# Altium PCB TIDA-010954-RevB.PcbDoc (part 3 of 8)
Units mm, origin at the board's own origin, x right, y up, seen from the top; angles counter-clockwise.
Board outline 290 x 100 mm, 6 copper layers (Top Layer, Mid1, Mid2, Mid3, Mid4, Bottom Layer), stack 1.59 mm thick; 394 components, 204 nets, 1137 pads, 2188 vias.
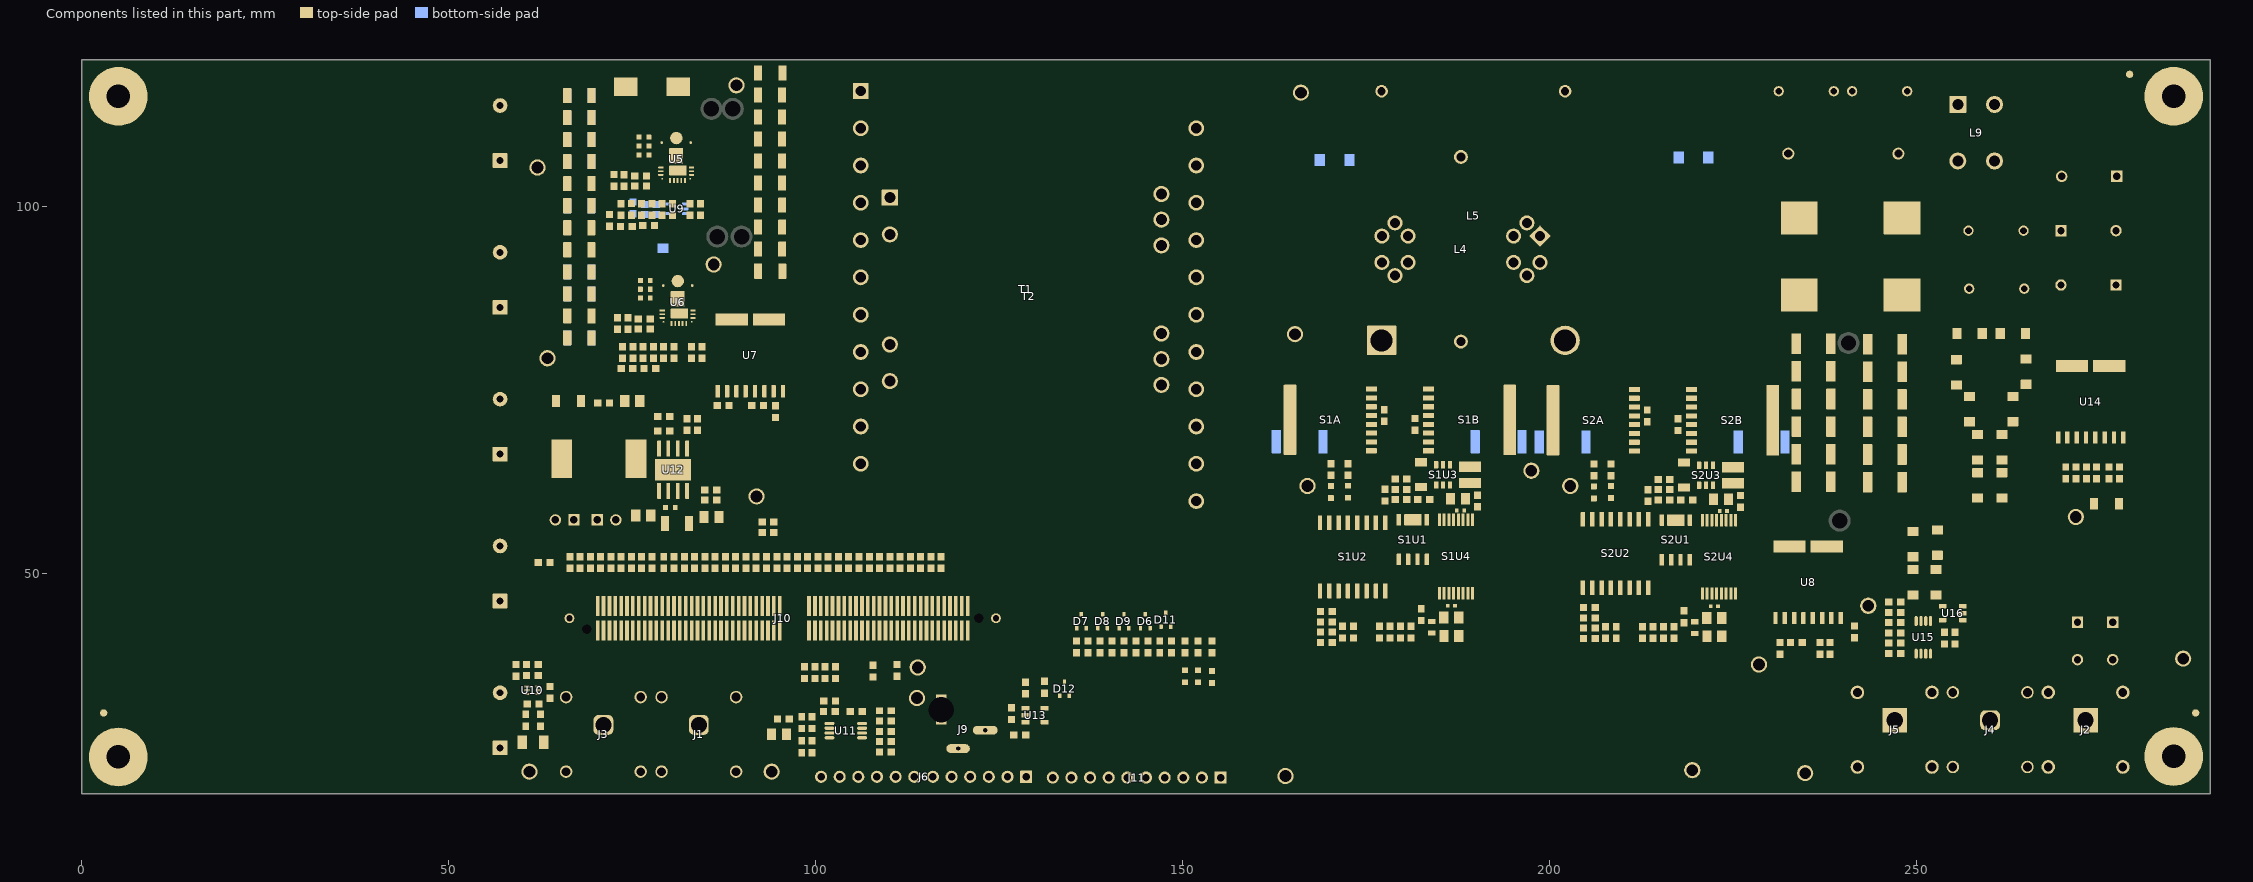
[diagram p6: the components of this part, seen from the top]

## Part data (continued)
J5: library part CMP-0098294-2, "Banana Test Connector, Socket, PCB Mount, 24 A, 1 kV, Gold Plated Contacts, Green", Current_A=24A, Digikey Part Number=4654-FCR7350G-ND, Manufacturer="CLIFF Electronic Components", Operating Temperature Range="-40°C to +80°C", Voltage_V=1kV, AEC Qualified=No, ComponentLink1Description=Datasheet, ComponentLink1URL=https://www.cliffuk.co.uk/products/testleads/sockets/fcr7350.pdf, Conn Orientation="Right Angle", ContactFinish=Gold, datasheet=https://www.cliffuk.co.uk/products/testleads/sockets/fcr7350.pdf, Datasheet Path=datasheets/Conn-FCR7350G.pdf, Digikey Description="4MM PANEL SKT S16N-PC GREEN", helpURL=https://upverter.com/upn/revision/a67ebcb8ee144784/, Lead Free=Yes, PackageReference=CONN_BANANA_JACK, Part Number=FCR7350G, PartNumber=FCR7350G, PinCount=1, RoHS=TRUE, SizeZ_mm=11.6mm, Standoff Height=0.7mm, Supplier 1=Digikey, Supplier Part Number 1=4654-FCR7350G-ND
J6: library part CMP-0075424-1, "Header, 100mil, 12x1, Gold, TH", Color=Black, Current_A=6.3A, Manufacturer=Samtec, Supplier Part Number 1=SAM1029-12-ND, Voltage_V=550V, Cert_CSA=Y, Cert_CULUS=N, Cert_UL=Y, Cert_VDE=N, ClassName=Header, CNHeader=True, ComponentLink1Description="Datasheet URL", ComponentLink1URL=http://samtec.com/ftppub/pdf/TSW_TH.PDF, CompType=Header, ContactFinish=Gold, CT=False, Gender=Male, LatestRevisionDate=2017-07-12, MountType=TH, Orientation=Vertical, PackageReference="12x1 Header", PartNumber=TSW-112-07-G-S, PinCount=12, Pitch_mm=2.54, Publisher="Texas Instruments", RoHS=Y, Row_Count=1, Shrouded=N, Supplier 1=Digi-Key
J7 J8: library part CMP-0055333-1, "Header, 2.54mm, 2x1, Tin, TH", Color=Black, Current_A=4A, Manufacturer=Molex, Supplier Part Number 1=WM50016-02-ND, Voltage_V=250V, Cert_UL=Y, ClassName=Header, CNHeader=TRUE, ComponentLink1Description="Datasheet URL", ComponentLink1URL=http://www.molex.com/pdm_docs/sd/022284023_sd.pdf, CompType=Header, ContactFinish=Tin, CT=FALSE, Gender=Male, LatestRevisionDate=26/05/2017, MountType=TH, Orientation=Vertical, PackageReference="Header, 2.54mm, 2x1, TH", PartNumber=22284023, PinCount=2, Pitch_mm=2.54, Publisher="Texas Instruments", RoHS=Y, Row_Count=1, Shrouded=N, Supplier 1=Digi-Key
J9: library part CMP-0040211-1, "Power Barrel Connector Jack 2.10mm ID (0.083\"), 5.50mm OD (0.217\") Through Hole", Current_A=3A, Digikey Part Number=732-5931-ND, Manufacturer="Wurth Electronics", Mouser Part Number=710-694106402002, Operating Temperature Range="-40°C to +85°C", Voltage_V=30V, AEC Qualified=No, ComponentLink1Description=Datasheet, ComponentLink1URL=https://www.we-online.com/components/products/datasheet/694106402002.pdf, Conn Gender=Female, Conn Orientation=Vertical, ContactFinish=Gold, datasheet=https://www.we-online.com/components/products/datasheet/694106402002.pdf, Datasheet Path=datasheets/Conn-694106402002.pdf, Digikey Description="CONN PWR JACK 2.1X5.5MM SOLDER", helpURL=https://upverter.com/upn/revision/1809d497b2602ff5/, Lead Free=Yes, Mouser Description="DC Power Jack Connector WR-DC, Male, Vertical, THT, 3 A, 20 V", PackageReference=CONN_PWR_10MM7_9MM0, Part Number=694106402002, PartNumber=694106402002, PinCount=1, RoHS=TRUE, SizeZ_mm=14.3mm, Supplier 1=Digikey, Supplier 2=Mouser, Supplier Part Number 1=732-5931-ND, Supplier Part Number 2=710-694106402002
J10: library part CMP-0003814-2, "C2000 controlCARD-120HSEC connector, SMT", Manufacturer=Samtec, ComponentLink1Description="Datasheet Link", ComponentLink1URL=http://www.samtec.com/ftppub/pdf/hsec8_dv.pdf, CompType=Connector, MountType=SMT, Note="The pin numbering does not match Samtec datasheet", PackageReference="C2000 pin numbering", PartNumber=HSEC8-160-01-L-DV-A-BL, RoHS=Y
J11: library part CMP-0075422-1, "Header, 100mil, 10x1, Gold, TH", Color=Black, Current_A=6.3A, Manufacturer=Samtec, Supplier Part Number 1=SAM1029-10-ND, Voltage_V=550V, Cert_CSA=Y, Cert_CULUS=N, Cert_UL=Y, Cert_VDE=N, ClassName=Header, CNHeader=True, ComponentLink1Description="Datasheet URL", ComponentLink1URL=http://samtec.com/ftppub/pdf/TSW_TH.PDF, CompType=Header, ContactFinish=Gold, CT=False, Gender=Male, Green_EU RoHS=Passed, Green_EU RoHS-2=Passed, Green_Lifecycle=Active, Green_REACh=Passed, LatestRevisionDate=2017-07-12, MountType=TH, Orientation=Vertical, PackageReference="10x1 Header", PartNumber=TSW-110-07-G-S, PinCount=10, Pitch_mm=2.54, Publisher="Texas Instruments", RoHS=Y, Row_Count=1, Shrouded=N, Supplier 1=Digi-Key
L3: library part CMP-0098580-1, "WE-HCM SMT High Current Flat Wire Inductor, size 1078, 0.14uH, 38A, 0.29mOhm", Case/Size Code=1078, DC Resistance=0.29mOhm, Inductance=0.3uH, Manufacturer="Wurth Elektronik", Operating Temperature Max=125°C, Operating Temperature Min=-40°C, Rated Current=38A, Rated Inductance=0.14uH, Saturation Current=34.6A, Self Resonant Frequency=33MHz, Category="Power Inductors", Component Type=Standard, ComponentLink1Description="Website Link", ComponentLink1URL=https://www.we-online.com/redexpert/article/7443081030?ad, ComponentLink2Description="Datasheet Link", ComponentLink2URL=https://www.we-online.com/redexpert/spec/7443081030?ad, Design Item ID=7443081030, Height=7.8mm, Length=9.4mm, Manufacturer Part Number=7443081030, Match Code=WE-HCM, Material=MnZn, Mount="Surface Mount", Packaging="Tape and Reel", PartNumber=7443081030, Pin Count=2, Source=Inductors.SchLib, Width=6.2mm
L4: library part CMP-0123014-1, "Inductor, 3 uH, 3mOhm", Manufacturer="Wurth Electronics", Operating Temperature Range="-40°C to +125°C", Test Frequency=10kHz, Tolerance_%=10%, AEC Qualified=No, Datasheet Path=datasheets/Ind-750371976r00.pdf, DCR_ohm=3m, helpURL=https://upverter.com/upn/revision/9174a4345abaf52b/, Ind_H=3µH, Lead Free=Yes, PackageReference=XFRMR_22MM0_22MM0, Part Number=750371976r00, PartNumber=750371976r00, RoHS=TRUE, SizeZ_mm=17.27mm, Technology=Wirewound
L5: library part CMP-0123108-1, "Inductor 5uH", Manufacturer=Bourns, Operating Temperature Range="-40°C to +125°C", Test Frequency=100kHz, Tolerance_%=10%, AEC Qualified=No, Datasheet Path=datasheets/Ind-B181125V0.pdf, DCR_ohm=3.6m, helpURL=https://upverter.com/upn/revision/4e8e535f5f00be80/, Ind_H=5µH, Isat=20A, Lead Free=Yes, PackageReference=PTH_IND_41MM45_35MM1, Part Number=B181125V0, PartNumber=B181125V0, RoHS=TRUE, SizeZ_mm=16.75mm, Technology=Wirewound
L6: library part CMP-0058745-1, "Inductor, Multilayer, Ferrite, 2.2 uH, 0.95 A, 0.18 ohm, SMD", Manufacturer=MuRata, Supplier Part Number 1=LQM21PN2R2MGSD-ND, Value1="0.18 ohm", Value2=0.95A, ValueDisplayed=2.2uH, AEC Category=Q200, AEC Qualified=?, ComponentLink1Description="Datasheet link", ComponentLink1URL=http://www.murata.com/products/catalog/pdf/o05e.pdf, CompType=Inductor, DCR_ohm=1.8d, Green_EU RoHS=Passed, Green_EU RoHS-2=Incomplete, Green_Lifecycle=Active, Green_REACh=Passed, Imax_A=9.5dA, Ind_H=2.2µH, LatestRevisionDate=2017-06-02, Material=Ferrite, MountType=SMT, PackageReference=0805, PartNumber=LQM21PN2R2MGS, Published=2008-06-26, Publisher="Texas Instruments", RoHS=Y, SizeArea_mm2=2.5, SizeAreaWB_mm2=6.75, SizeX_mm=2, SizeY_mm=1.25, SizeZ_mm=1.45, Supplier 1=Digi-Key, Technology=Multilayer
L7: library part CMP-0057850-2, "Inductor, Drum Core, Ferrite, 33 uH, 3.7 A, 0.052 ohm, SMD", Manufacturer=Bourns, Supplier Part Number 1=SRR1210-330MCT-ND, Value1="0.052 ohm", Value2=3.7A, ValueDisplayed=33uH, AEC Category=Q200, AEC Qualified=?, ComponentLink1Description="Datasheet link", ComponentLink1URL=http://www.bourns.com/data/global/pdfs/SRR1210.pdf, CompType=Inductor, DCR_ohm=0.052, Green_EU RoHS=Passed, Green_EU RoHS-2=Incomplete, Green_Lifecycle=Active, Green_REACh=Passed, Imax_A=3.7A, Ind_H=33µH, Irms="4.4A @ 40C rise", Isat="3.7A @ 20% inductance drop", LatestRevisionDate=2017-06-02, Material=Ferrite, MountType=SMT, PackageReference=12x10x12mm, PartNumber=SRR1210-330M, Published=2008-06-26, Publisher="Texas Instruments", RoHS=Y, SizeArea_mm2=144, SizeAreaWB_mm2=196, SizeX_mm=12, SizeY_mm=12, SizeZ_mm=10, Supplier 1=Digi-Key, Supplier 2=Mouser, Supplier Part Number 2=652-SRR1210-330M, Technology="Drum Core"
L8 L10: library part CMP-0095148-1, "22 µH Shielded Wirewound Inductor 6 A 24.7mOhm Nonstandard", Digikey Part Number=732-2183-1-ND, Manufacturer="Wurth Electronics", Mouser Part Number=710-7443551221, Operating Temperature Range="-40°C to +155°C", Self Resonant Frequency=14MHz, Test Frequency=100kHz, Tolerance_%=20%, AEC Grade="Grade 1", AEC Qualified=Yes, ComponentLink1Description=Datasheet, ComponentLink1URL=https://www.we-online.com/catalog/datasheet/7443551221.pdf, datasheet=https://www.we-online.com/catalog/datasheet/7443551221.pdf, Datasheet Path=datasheets/Ind-7443551221.pdf, DCR_ohm=27.17m, Digikey Description="FIXED IND 22UH 6A 24.7 MOHM SMD", helpURL=https://upverter.com/upn/revision/b15f86e6b6b9e262/, Ind_H=22µH, Irms=6A, Isat=3A, Lead Free=Yes, PackageReference=SMD_IND_12MM8_12MM8, Part Number=7443551221, PartNumber=7443551221, RoHS=TRUE, Shrouded=true, SizeZ_mm=6.5mm, Supplier 1=Digikey, Supplier 2=Mouser, Supplier Part Number 1=732-2183-1-ND, Supplier Part Number 2=710-7443551221, TaMax_C=+105°C, TaMin_C=-40°C, Technology=Wirewound
L9: library part CMP-0094060-1, "2.5 mH @ 10 kHz 2 Line Common Mode Choke Through Hole 5A DCR 15mOhm", Digikey Part Number=732-13592-ND, Manufacturer="Wurth Electronics", Mouser Part Number=710-7448025003, Operating Temperature Range="-40°C to +125°C", Test Frequency=10kHz, Tolerance_%=+50/-30%, AEC Qualified=No, ComponentLink1Description=Datasheet, ComponentLink1URL=https://www.we-online.com/katalog/datasheet/7448025003.pdf, datasheet=https://www.we-online.com/katalog/datasheet/7448025003.pdf, Datasheet Path=datasheets/Ind-7448025003.pdf, DCR_ohm=15m, Digikey Description="CMC 2.5MH 5A 2LN TH", helpURL=https://upverter.com/upn/revision/9352e13fa7a1c14b/, Imax_A=5A, Ind_H=2.5mH, Lead Free=Yes, PackageReference=PTH_COMMON_CHOKE, Part Number=7448025003, PartNumber=7448025003, RoHS=TRUE, SizeZ_mm=22mm, Supplier 1=Digikey, Supplier 2=Mouser, Supplier Part Number 1=732-13592-ND, Supplier Part Number 2=710-7448025003
LBL1: library part CMP-0003625-1, "Thermal Transfer Printable Labels, 0.650\" W x 0.200\" H - 10,000 per roll", Manufacturer=Brady, Supplier Part Number 1=97C5133, ClassName=Label, ComponentLink1Description="Web Page", ComponentLink1URL=http://www.bradyid.com/bradyid/pdpv/THT-14-423-10.html, CompType=Label, Key=THT-14-423-10, LatestRevisionDate=2017-03-09, MountType=N/A, Note="Size: 0.65\" x 0.20 \"", PackageReference="PCB Label 0.650 x 0.200 inch", PartNumber=THT-14-423-10, Publisher="Texas Instruments", RoHS=Y, Supplier 1=Newark, Supplier 2=Farnell, Supplier Part Number 2=2065596
Logo1: library part CMP-0074844-1, LatestRevisionDate=2017-07-06, Lib Reference="CE Mark", PartNumber="CE Mark", Published=2009-03-03, Publisher="Texas Instruments", SymbolCreator=a0412235
Logo2: library part CMP-0074838-1, "Texas Instrument Corporate Signature", ClassName=Logo, LatestRevisionDate=2017-07-06, Lib Reference=TI_Logo, PartNumber="Texas Instruments", Published=2009-03-03, Publisher="Texas Instruments", SymbolCreator=a0412235, SymbolVersion=2011-08-22
Logo3: library part CMP-0074847-1, "FCC_disclaimer", LatestRevisionDate=2017-07-06, Lib Reference=FCC_disclaimer, PartNumber="FCC disclaimer", Published=2009-03-03, Publisher="Texas Instruments"
Logo4: library part CMP-0074769-1, Lib Reference="WEEE logo", PartNumber="WEEE logo"
LOGO5: library part CMP-0074837-1, "IEC 61010-1 Hot Surface Warning", LatestRevisionDate=2017-07-06, Lib Reference=IEC_HotSurface, PartNumber="CAUTION HOT SURFACE", Published=2009-03-03, Publisher="Texas Instruments", SymbolCreator=a0412235, SymbolVersion=2011-08-22
LOGO6: library part CMP-0074835-1, "IEC 61010-1 High Voltage Warning", LatestRevisionDate=2017-07-06, Lib Reference=IEC_HighVoltage, PartNumber="DANGER HIGH VOLTAGE", Published=2009-03-03, Publisher="Texas Instruments", SymbolCreator=a0412235, SymbolVersion=2011-08-22
NT1: library part CMP-0078142-6, "Single point connection between nets.", Manufacturer=N/A, CompType=Net-Tie, MountType=SMT, PackageReference=N/A, PartNumber=N/A
R15 R21 R27 R32 R64 R66 R67 R69 R70 R71 R72 R83 R85 R86 R87 R88 R89 R90 R91 R92 R93 R111 S1R4 S1R6 S2R4 S2R6: library part CMP-0023169-5, "RES, 51.0, 1%, 0.1 W, 0603", Manufacturer=Yageo, Power_W=100mW, Supplier Part Number 1=311-51.0HRCT-ND, TempCo="100 ppm/C", Tolerance_%=1%, Value2=0.1W, Value_Code=51R0, ValueDisplayed=51.0, AEC Category=Q200, AEC Grade=N/A, AEC Qualified=N, ComponentLink1Description="Datasheet link", ComponentLink1URL=http://www.yageo.com/pdf/Pu-RC0603_51_PbFree_L_2.pdf, CompType=Resistor, MountType=SMT, PackageReference=0603, PartNumber=RC0603FR-0751RL, Res_ohm=51, RoHS=Y, SizeArea_mm2=1.28, SizeAreaWB_mm2=4.68, SizeX_mm=1.6, SizeY_mm=0.8, SizeZ_mm=1, Supplier 1=Digi-Key, Supplier 2=Mouser, Supplier 3=Farnell, Supplier Part Number 2=603-RC0603FR-0751RL, Supplier Part Number 3=1799350, Technology="Thick Film", Value1=1%, VDC_V=75V
R16 R18 R26 R29 R73 R74 R75 R76 R77 R78 R79 R80 R81 R94: library part CMP-0025885-5, "RES, 0, 5%, 0.1 W, 0603", Manufacturer=Yageo, Power_W=100mW, Supplier Part Number 1=311-0.0GRCT-ND, TempCo="200 ppm/C", Tolerance_%=5%, Value2=0.1W, Value_Code=0000, ValueDisplayed=0, AEC Category=Q200, AEC Grade=N/A, AEC Qualified=N, ComponentLink1Description="Datasheet link", ComponentLink1URL=http://www.yageo.com/pdf/Pu-RC0603_51_PbFree_L_2.pdf, CompType=Resistor, EIA_Code=E24, MountType=SMT, PackageReference=0603, PartNumber=RC0603JR-070RL, Res_ohm=0, RoHS=Y, SizeArea_mm2=1.28, SizeAreaWB_mm2=4.68, SizeX_mm=1.6, SizeY_mm=0.8, SizeZ_mm=1, Supplier 1=Digi-Key, Supplier 2=Mouser, Supplier 3=Farnell, Supplier Part Number 2=603-RC0603JR-070RL, Supplier Part Number 3=9233130, Technology="Thick Film", Value1=5%, VDC_V=75V
R17 R24 R28 R35 S1R5 S1R7 S1R8 S2R5 S2R7 S2R8: library part CMP-0022746-5, "RES, 10.0 k, 1%, 0.1 W, 0603", Manufacturer=Yageo, Power_W=100mW, Supplier Part Number 1=311-10.0KHRCT-ND, TempCo="100 ppm/C", Tolerance_%=1%, Value2=0.1W, Value_Code=10k0, ValueDisplayed=10.0k, AEC Category=Q200, AEC Grade=N/A, AEC Qualified=N, ComponentLink1Description="Datasheet link", ComponentLink1URL=http://www.yageo.com/pdf/Pu-RC0603_51_PbFree_L_2.pdf, CompType=Resistor, EIA_Code=E96, MountType=SMT, PackageReference=0603, PartNumber=RC0603FR-0710KL, Res_ohm=10k, RoHS=Y, SizeArea_mm2=1.28, SizeAreaWB_mm2=4.68, SizeX_mm=1.6, SizeY_mm=0.8, SizeZ_mm=1, Supplier 1=Digi-Key, Supplier 2=Mouser, Supplier 3=Farnell, Supplier Part Number 2=603-RC0603FR-0710KL, Supplier Part Number 3=9238603, Technology="Thick Film", Value1=1%, VDC_V=75V
R19 R20 R22 R23 R30 R31 R33 R34 R65 R68 R84: library part CMP-0025909-5, "RES, 2.0 k, 5%, 0.1 W, 0603", Manufacturer=Yageo, Power_W=100mW, Supplier Part Number 1=311-2.0KGRCT-ND, TempCo="100 ppm/C", Tolerance_%=5%, Value2=0.1W, Value_Code=2k00, ValueDisplayed=2.0k, AEC Category=Q200, AEC Grade=N/A, AEC Qualified=N, ComponentLink1Description="Datasheet link", ComponentLink1URL=http://www.yageo.com/pdf/Pu-RC0603_51_PbFree_L_2.pdf, CompType=Resistor, EIA_Code=E24, MountType=SMT, PackageReference=0603, PartNumber=RC0603JR-072KL, Res_ohm=2k, RoHS=Y, SizeArea_mm2=1.28, SizeAreaWB_mm2=4.68, SizeX_mm=1.6, SizeY_mm=0.8, SizeZ_mm=1, Supplier 1=Digi-Key, Supplier 2=Mouser, Supplier 3=Farnell, Supplier Part Number 2=603-RC0603JR-072KL, Supplier Part Number 3=1799398, Technology="Thick Film", Value1=5%, VDC_V=75V
R25: library part CMP-0023153-5, "RES, 4.70 k, 1%, 0.1 W, 0603", Manufacturer=Yageo, Power_W=100mW, Supplier Part Number 1=311-4.70KHRCT-ND, TempCo="100 ppm/C", Tolerance_%=1%, Value2=0.1W, Value_Code=4k70, ValueDisplayed=4.70k, AEC Category=Q200, AEC Grade=N/A, AEC Qualified=N, ComponentLink1Description="Datasheet link", ComponentLink1URL=http://www.yageo.com/pdf/Pu-RC0603_51_PbFree_L_2.pdf, CompType=Resistor, MountType=SMT, PackageReference=0603, PartNumber=RC0603FR-074K7L, Res_ohm=4.7k, RoHS=Y, SizeArea_mm2=1.28, SizeAreaWB_mm2=4.68, SizeX_mm=1.6, SizeY_mm=0.8, SizeZ_mm=1, Supplier 1=Digi-Key, Supplier 2=Mouser, Supplier 3=Farnell, Supplier Part Number 2=603-RC0603FR-074K7L, Supplier Part Number 3=9238565, Technology="Thick Film", Value1=1%, VDC_V=75V
R36 R37 R43 R46 R50 R54 R101 R119 S1R1 S2R1: library part CMP-0023013-5, "RES, 300, 1%, 0.1 W, 0603", Manufacturer=Yageo, Power_W=100mW, Supplier Part Number 1=311-300HRCT-ND, TempCo="100 ppm/C", Tolerance_%=1%, Value2=0.1W, Value_Code=300R, ValueDisplayed=300, AEC Category=Q200, AEC Grade=N/A, AEC Qualified=N, ComponentLink1Description="Datasheet link", ComponentLink1URL=http://www.yageo.com/pdf/Pu-RC0603_51_PbFree_L_2.pdf, CompType=Resistor, MountType=SMT, PackageReference=0603, PartNumber=RC0603FR-07300RL, Res_ohm=300, RoHS=Y, SizeArea_mm2=1.28, SizeAreaWB_mm2=4.68, SizeX_mm=1.6, SizeY_mm=0.8, SizeZ_mm=1, Supplier 1=Digi-Key, Supplier 2=Mouser, Supplier 3=Farnell, Supplier Part Number 2=603-RC0603FR-07300RL, Supplier Part Number 3=1799340, Technology="Thick Film", Value1=1%, VDC_V=75V
R38 R97 R105 R106 R107 R108 R109 R110 R112 R113 R114 R115 R116 R117: library part CMP-0122928-1, "499 kOhms ±0.5% 0.667W, 2/3W Chip Resistor 1206 (3216 Metric) Automotive AEC-Q200, Pulse Withstanding Thick Film", Digikey Part Number=ERJ-P08D4993V-ND, Manufacturer=Panasonic, Mouser Part Number=667-ERJ-P08D4993V, Operating Temperature Range="-55°C to +155°C", Power_W=660mW, TempCo=100ppm/°C, Tolerance_%=0.5%, AEC Grade="Grade 0", AEC Qualified=Yes, ComponentLink1Description=Datasheet, ComponentLink1URL=https://api.pim.na.industrial.panasonic.com/file_stream/main/fileversion/1088, datasheet=https://api.pim.na.industrial.panasonic.com/file_stream/main/fileversion/1088, Datasheet Path=datasheets/Res-ERJP08D4993V.pdf, Digikey Description="RES SMD 499 KOHM 0.5% 2/3W 1206", helpURL=https://upverter.com/upn/revision/54f8c178e3016f2a/, Lead Free=Yes, Mouser Description="Thick Film Resistors - SMD 1206 499Kohms 0.66W 0.5% AEC-Q200", PackageReference=1206, Part Number=ERJP08D4993V, PartNumber=ERJP08D4993V, Res_ohm=499k, RoHS=TRUE, Series=ERJ, SizeZ_mm=0.7mm, Supplier 1=Digikey, Supplier 2=Mouser, Supplier Part Number 1=ERJ-P08D4993V-ND, Supplier Part Number 2=667-ERJ-P08D4993V, Technology="Thick Film", VDC_V=500V
R39 R41 R103: library part CMP-0023203-5, "RES, 5.60 k, 1%, 0.1 W, 0603", Manufacturer=Yageo, Power_W=100mW, Supplier Part Number 1=311-5.60KHRCT-ND, TempCo="100 ppm/C", Tolerance_%=1%, Value2=0.1W, Value_Code=5k60, ValueDisplayed=5.60k, AEC Category=Q200, AEC Grade=N/A, AEC Qualified=N, ComponentLink1Description="Datasheet link", ComponentLink1URL=http://www.yageo.com/pdf/Pu-RC0603_51_PbFree_L_2.pdf, CompType=Resistor, MountType=SMT, PackageReference=0603, PartNumber=RC0603FR-075K6L, Res_ohm=5.6k, RoHS=Y, SizeArea_mm2=1.28, SizeAreaWB_mm2=4.68, SizeX_mm=1.6, SizeY_mm=0.8, SizeZ_mm=1, Supplier 1=Digi-Key, Supplier 2=Mouser, Supplier 3=Farnell, Supplier Part Number 2=603-RC0603FR-075K6L, Supplier Part Number 3=9238573, Technology="Thick Film", Value1=1%, VDC_V=75V
R40 R42 R102: library part CMP-0022895-5, "RES, 1.00 k, 1%, 0.1 W, 0603", Manufacturer=Yageo, Power_W=100mW, Supplier Part Number 1=311-1.00KHRCT-ND, TempCo="100 ppm/C", Tolerance_%=1%, Value2=0.1W, Value_Code=1k00, ValueDisplayed=1.00k, AEC Category=Q200, AEC Grade=N/A, AEC Qualified=N, ComponentLink1Description="Datasheet link", ComponentLink1URL=http://www.yageo.com/pdf/Pu-RC0603_51_PbFree_L_2.pdf, CompType=Resistor, EIA_Code=E96, MountType=SMT, PackageReference=0603, PartNumber=RC0603FR-071KL, Res_ohm=1k, RoHS=Y, SizeArea_mm2=1.28, SizeAreaWB_mm2=4.68, SizeX_mm=1.6, SizeY_mm=0.8, SizeZ_mm=1, Supplier 1=Digi-Key, Supplier 2=Mouser, Supplier 3=Farnell, Supplier Part Number 2=603-RC0603FR-071KL, Supplier Part Number 3=9238484, Technology="Thick Film", Value1=1%, VDC_V=75V
R44: library part CMP-0078821-1, "RES, 0.001, 1%, 1 W, AEC-Q200 Grade 0, 1206", Manufacturer=Bourns, Power_W=1W, TempCo="50 ppm/C", Tolerance_%=1%, Value_Code=1L000, ValueDisplayed=0.001, AEC Category=Q200, AEC Grade=0, AEC Qualified=Y, ComponentLink1Description="Datasheet link", ComponentLink1URL=http://www.bourns.com/docs/Product-Datasheets/crf.pdf, CompType=Resistor, EIA_Code=E96, MountType=SMT, PackageReference=1206, PartNumber=CRF1206-FZ-R001ELF, Res_ohm=1m, RoHS=Y, SizeArea_mm2=5.12, SizeX_mm=3.2, SizeY_mm=1.6, SizeZ_mm=1.35, Technology="Metal Film", Value1=1%, Value2=1W
R45 R47: library part CMP-0025914-5, "RES, 360, 5%, 0.1 W, 0603", Manufacturer=Yageo, Power_W=100mW, Supplier Part Number 1=311-360GRCT-ND, TempCo="100 ppm/C", Tolerance_%=5%, Value2=0.1W, Value_Code=360R, ValueDisplayed=360, AEC Category=Q200, AEC Grade=N/A, AEC Qualified=N, ComponentLink1Description="Datasheet link", ComponentLink1URL=http://www.yageo.com/pdf/Pu-RC0603_51_PbFree_L_2.pdf, CompType=Resistor, EIA_Code=E24, MountType=SMT, PackageReference=0603, PartNumber=RC0603JR-07360RL, Res_ohm=360, RoHS=Y, SizeArea_mm2=1.28, SizeAreaWB_mm2=4.68, SizeX_mm=1.6, SizeY_mm=0.8, SizeZ_mm=1, Supplier 1=Digi-Key, Supplier 2=Mouser, Supplier Part Number 2=603-RC0603JR-07360RL, Technology="Thick Film", Value1=5%, VDC_V=75V
R48 R53 R55: library part CMP-0023630-3, "RES, 100 k, 0.1%, 0.1 W, 0603", Manufacturer="Yageo America", Power_W=100mW, Supplier Part Number 1=603-RT0603BRD07100KL, TempCo="25 ppm/C", Tolerance_%=0.1%, Value2=0.1W, Value_Code=100k, AEC Category=Q200, AEC Qualified=?, ComponentLink1Description="Datasheet link", ComponentLink1URL=http://www.yageo.com/pdf/PYu-RT_1-to-0.05_RoHS_L_3.pdf, CompType=Resistor, EIA_Code=E192, LatestRevisionDate=2017-03-09, MountType=SMT, PackageReference=0603, PartNumber=RT0603BRD07100KL, Published=2008-06-26, Publisher="Texas Instruments", Res_ohm=100k, RoHS=Y, SizeArea_mm2=1.28, SizeX_mm=1.6, SizeY_mm=0.8, SizeZ_mm=1, Supplier 1=Mouser, Technology="Thin Film", U/M=EA, Value1=0.1%, ValueDisplayed=100k, VDC_V=75V
R49 R52: library part CMP-0024366-2, "RES, 5.11 k, 0.1%, 0.1 W, 0603", Manufacturer="Yageo America", Power_W=100mW, TempCo="25 ppm/C", Tolerance_%=0.1%, Value2=0.1W, Value_Code=5k11, ValueDisplayed=5.11k, AEC Category=Q200, AEC Qualified=?, ComponentLink1Description="Datasheet link", ComponentLink1URL=http://www.yageo.com/pdf/PYu-RT_1-to-0.05_RoHS_L_3.pdf, CompType=Resistor, EIA_Code=E192, LatestRevisionDate=2017-03-09, MountType=SMT, PackageReference=0603, PartNumber=RT0603BRD075K11L, Published=2008-06-26, Publisher="Texas Instruments", Res_ohm=5.11k, RoHS=Y, SizeArea_mm2=1.28, SizeX_mm=1.6, SizeY_mm=0.8, SizeZ_mm=1, Technology="Thin Film", U/M=EA, Value1=0.1%, VDC_V=75V
R51: library part CMP-0019441-2, "RES, 100 k, 0.1%, 0.125 W, 0805", Manufacturer="Yageo America", Power_W=125mW, TempCo="25 ppm/C", Tolerance_%=0.1%, Value2=0.125W, Value_Code=100k, AEC Category=Q200, AEC Qualified=?, ComponentLink1Description="Datasheet link", ComponentLink1URL=http://www.yageo.com/pdf/PYu-RT_1-to-0.05_RoHS_L_3.pdf, CompType=Resistor, EIA_Code=E192, LatestRevisionDate=2017-03-09, MountType=SMT, PackageReference=0805, PartNumber=RT0805BRD07100KL, Published=2008-06-26, Publisher="Texas Instruments", Res_ohm=100k, RoHS=Y, SizeArea_mm2=2.5, SizeX_mm=2, SizeY_mm=1.25, SizeZ_mm=1.45, Technology="Thin Film", U/M=EA, Value1=0.1%, ValueDisplayed=100k, VDC_V=150V
R56: library part CMP-0023024-4, "RES, 316 k, 1%, 0.1 W, 0603", Manufacturer=Yageo, Power_W=100mW, Supplier Part Number 1=311-316KHRCT-ND, TempCo="100 ppm/C", Tolerance_%=1%, Value2=0.1W, Value_Code=316k, AEC Category=Q200, AEC Grade=N/A, AEC Qualified=N, ComponentLink1Description="Datasheet link", ComponentLink1URL=http://www.yageo.com/pdf/Pu-RC0603_51_PbFree_L_2.pdf, CompType=Resistor, EIA_Code=E96, MountType=SMT, PackageReference=0603, PartNumber=RC0603FR-07316KL, Res_ohm=316k, RoHS=Y, SizeArea_mm2=1.28, SizeAreaWB_mm2=4.68, SizeX_mm=1.6, SizeY_mm=0.8, SizeZ_mm=1, Supplier 1=Digi-Key, Supplier 2=Mouser, Supplier Part Number 2=603-RC0603FR-07316KL, Technology="Thick Film", Value1=1%, ValueDisplayed=316k, VDC_V=75V
R57 R59 R100 S1R13 S2R13: library part CMP-0022735-5, "RES, 100 k, 1%, 0.1 W, 0603", Manufacturer=Yageo, Power_W=100mW, Supplier Part Number 1=311-100KHRCT-ND, TempCo="100 ppm/C", Tolerance_%=1%, Value2=0.1W, Value_Code=100k, AEC Category=Q200, AEC Grade=N/A, AEC Qualified=N, ComponentLink1Description="Datasheet link", ComponentLink1URL=http://www.yageo.com/pdf/Pu-RC0603_51_PbFree_L_2.pdf, CompType=Resistor, EIA_Code=E96, MountType=SMT, PackageReference=0603, PartNumber=RC0603FR-07100KL, Res_ohm=100k, RoHS=Y, SizeArea_mm2=1.28, SizeAreaWB_mm2=4.68, SizeX_mm=1.6, SizeY_mm=0.8, SizeZ_mm=1, Supplier 1=Digi-Key, Supplier 2=Mouser, Supplier 3=Farnell, Supplier Part Number 2=603-RC0603FR-07100KL, Supplier Part Number 3=9238727, Technology="Thick Film", Value1=1%, ValueDisplayed=100k, VDC_V=75V
R58: library part CMP-0020522-3, "RES, 300 k, 5%, 0.125 W, AEC-Q200 Grade 0, 0805", Manufacturer=Vishay-Dale, Power_W=125mW, Supplier Part Number 1=541-300KACT-ND, TempCo="200 ppm/C", Tolerance_%=5%, Value2=0.125W, Value_Code=300k, AEC Category=Q200, AEC Grade=0, AEC Qualified=Y, ComponentLink1Description="Datasheet link", ComponentLink1URL=http://www.vishay.com/docs/20035/dcrcwe3.pdf, CompType=Resistor, EIA_Code=E24, MountType=SMT, PackageReference=0805, PartNumber=CRCW0805300KJNEA, Res_ohm=300k, RoHS=E, SizeArea_mm2=2.5, SizeX_mm=2, SizeY_mm=1.25, SizeZ_mm=1.45, Supplier 1=Digi-Key, Technology="Thick Film", Value1=5%, ValueDisplayed=300k, VDC_V=150V
R60: library part CMP-0023106-5, "RES, 42.2 k, 1%, 0.1 W, 0603", Manufacturer=Yageo, Power_W=100mW, Supplier Part Number 1=311-42.2KHRCT-ND, TempCo="100 ppm/C", Tolerance_%=1%, Value2=0.1W, Value_Code=42k2, ValueDisplayed=42.2k, AEC Category=Q200, AEC Grade=N/A, AEC Qualified=N, ComponentLink1Description="Datasheet link", ComponentLink1URL=http://www.yageo.com/pdf/Pu-RC0603_51_PbFree_L_2.pdf, CompType=Resistor, EIA_Code=E96, MountType=SMT, PackageReference=0603, PartNumber=RC0603FR-0742K2L, Res_ohm=42.2k, RoHS=Y, SizeArea_mm2=1.28, SizeAreaWB_mm2=4.68, SizeX_mm=1.6, SizeY_mm=0.8, SizeZ_mm=1, Supplier 1=Digi-Key, Supplier 2=Mouser, Supplier Part Number 2=603-RC0603FR-0742K2L, Technology="Thick Film", Value1=1%, VDC_V=75V
R61: library part CMP-0022901-4, "RES, 200 k, 1%, 0.1 W, 0603", Manufacturer=Yageo, Power_W=100mW, Supplier Part Number 1=311-200KHRCT-ND, TempCo="100 ppm/C", Tolerance_%=1%, Value2=0.1W, Value_Code=200k, AEC Category=Q200, AEC Grade=N/A, AEC Qualified=N, ComponentLink1Description="Datasheet link", ComponentLink1URL=http://www.yageo.com/pdf/Pu-RC0603_51_PbFree_L_2.pdf, CompType=Resistor, EIA_Code=E96, MountType=SMT, PackageReference=0603, PartNumber=RC0603FR-07200KL, Res_ohm=200k, RoHS=Y, SizeArea_mm2=1.28, SizeAreaWB_mm2=4.68, SizeX_mm=1.6, SizeY_mm=0.8, SizeZ_mm=1, Supplier 1=Digi-Key, Supplier 2=Mouser, Supplier 3=Farnell, Supplier Part Number 2=603-RC0603FR-07200KL, Supplier Part Number 3=1799334, Technology="Thick Film", Value1=1%, ValueDisplayed=200k, VDC_V=75V
R62: library part CMP-0022883-5, "RES, 1.50 k, 1%, 0.1 W, 0603", Manufacturer=Yageo, Power_W=100mW, Supplier Part Number 1=311-1.50KHRCT-ND, TempCo="100 ppm/C", Tolerance_%=1%, Value2=0.1W, Value_Code=1k50, ValueDisplayed=1.50k, AEC Category=Q200, AEC Grade=N/A, AEC Qualified=N, ComponentLink1Description="Datasheet link", ComponentLink1URL=http://www.yageo.com/pdf/Pu-RC0603_51_PbFree_L_2.pdf, CompType=Resistor, EIA_Code=E96, MountType=SMT, PackageReference=0603, PartNumber=RC0603FR-071K5L, Res_ohm=1.5k, RoHS=Y, SizeArea_mm2=1.28, SizeAreaWB_mm2=4.68, SizeX_mm=1.6, SizeY_mm=0.8, SizeZ_mm=1, Supplier 1=Digi-Key, Supplier 2=Mouser, Supplier 3=Farnell, Supplier Part Number 2=603-RC0603FR-071K5L, Supplier Part Number 3=9238506, Technology="Thick Film", Value1=1%, VDC_V=75V
R63 S1R10 S2R10: library part CMP-0023081-5, "RES, 3.30 k, 1%, 0.1 W, 0603", Manufacturer=Yageo, Power_W=100mW, Supplier Part Number 1=311-3.30KHRCT-ND, TempCo="100 ppm/C", Tolerance_%=1%, Value2=0.1W, Value_Code=3k30, ValueDisplayed=3.30k, AEC Category=Q200, AEC Grade=N/A, AEC Qualified=N, ComponentLink1Description="Datasheet link", ComponentLink1URL=http://www.yageo.com/pdf/Pu-RC0603_51_PbFree_L_2.pdf, CompType=Resistor, MountType=SMT, PackageReference=0603, PartNumber=RC0603FR-073K3L, Res_ohm=3.3k, RoHS=Y, SizeArea_mm2=1.28, SizeAreaWB_mm2=4.68, SizeX_mm=1.6, SizeY_mm=0.8, SizeZ_mm=1, Supplier 1=Digi-Key, Supplier 2=Mouser, Supplier 3=Farnell, Supplier Part Number 2=603-RC0603FR-073K3L, Supplier Part Number 3=9238549, Technology="Thick Film", Value1=1%, VDC_V=75V
R82: library part CMP-0022769-5, "RES, 120, 1%, 0.1 W, 0603", Manufacturer=Yageo, Power_W=100mW, Supplier Part Number 1=311-120HRCT-ND, TempCo="100 ppm/C", Tolerance_%=1%, Value2=0.1W, Value_Code=120R, ValueDisplayed=120, AEC Category=Q200, AEC Grade=N/A, AEC Qualified=N, ComponentLink1Description="Datasheet link", ComponentLink1URL=http://www.yageo.com/pdf/Pu-RC0603_51_PbFree_L_2.pdf, CompType=Resistor, MountType=SMT, PackageReference=0603, PartNumber=RC0603FR-07120RL, Res_ohm=120, RoHS=Y, SizeArea_mm2=1.28, SizeAreaWB_mm2=4.68, SizeX_mm=1.6, SizeY_mm=0.8, SizeZ_mm=1, Supplier 1=Digi-Key, Supplier 2=Mouser, Supplier 3=Farnell, Supplier Part Number 2=603-RC0603FR-07120RL, Supplier Part Number 3=9238379, Technology="Thick Film", Value1=1%, VDC_V=75V
R95 R96 R99: library part CMP-0097027-1, "3 kA Varistor 1 Circuit Through Hole Disc 13.2mm", Clamping Voltage=730V, Digikey Part Number=118-ISOM3-275-B-L2-ND, Manufacturer=Bourns, Mouser Part Number=652-ISOM3-275-B-L2, Operating Temperature Range="-40°C to +125°C", ValueDisplayed=30pF, AEC Qualified=No, Cap_F=30pF, ComponentLink1Description=Datasheet, ComponentLink1URL=https://www.bourns.com/docs/product-datasheets/isomov.pdf, datasheet=https://www.bourns.com/docs/product-datasheets/isomov.pdf, Datasheet Path=datasheets/Res-IsoM3-275-B-L2.pdf, Digikey Description="ISOMOV 3KA 275VRMS BULK IN-LINE", helpURL=https://upverter.com/upn/revision/432fc44c5de15415/, Lead Free=Yes, PackageReference=RADIAL, Part Number=IsoM3-275-B-L2, PartNumber=IsoM3-275-B-L2, RoHS=TRUE, SizeZ_mm=19mm, Vc=50A, VDC_V=350V
R98: library part CMP-0020534-3, "RES, 390 k, 5%, 0.125 W, AEC-Q200 Grade 0, 0805", Manufacturer=Vishay-Dale, Power_W=125mW, Supplier Part Number 1=541-390KACT-ND, TempCo="200 ppm/C", Tolerance_%=5%, Value2=0.125W, Value_Code=390k, AEC Category=Q200, AEC Grade=0, AEC Qualified=Y, ComponentLink1Description="Datasheet link", ComponentLink1URL=http://www.vishay.com/docs/20035/dcrcwe3.pdf, CompType=Resistor, EIA_Code=E24, MountType=SMT, PackageReference=0805, PartNumber=CRCW0805390KJNEA, Res_ohm=390k, RoHS=E, SizeArea_mm2=2.5, SizeX_mm=2, SizeY_mm=1.25, SizeZ_mm=1.45, Supplier 1=Digi-Key, Supplier 2=Newark, Supplier 3=Mouser, Supplier Part Number 2=59M6896, Supplier Part Number 3=71-CRCW0805390KJNEA, Technology="Thick Film", Value1=5%, ValueDisplayed=390k, VDC_V=150V
R104 R118: library part CMP-0023710-3, "RES, 12.0 k, 0.1%, 0.1 W, 0603", Manufacturer="Yageo America", Power_W=100mW, TempCo="25 ppm/C", Tolerance_%=0.1%, Value2=0.1W, Value_Code=12k0, ValueDisplayed=12.0k, AEC Category=Q200, AEC Qualified=?, ComponentLink1Description="Datasheet link", ComponentLink1URL=http://www.yageo.com/pdf/PYu-RT_1-to-0.05_RoHS_L_3.pdf, CompType=Resistor, EIA_Code=E192, LatestRevisionDate=2017-03-09, MountType=SMT, PackageReference=0603, PartNumber=RT0603BRD0712KL, Published=2008-06-26, Publisher="Texas Instruments", Res_ohm=12k, RoHS=Y, SizeArea_mm2=1.28, SizeX_mm=1.6, SizeY_mm=0.8, SizeZ_mm=1, Technology="Thin Film", U/M=EA, Value1=0.1%, VDC_V=75V
S1A S1B S2A S2B: library part CMP-0120607-2, Manufacturer="Texas Instruments", Operating Temperature Range=to, Part Number=LMG365x, AEC Category=Q200, AEC Qualified=No, ComponentLink1Description="Datasheet Link", ComponentLink1URL=http://www.ti.com/lit/ds/symlink/GPN.pdf, ComponentLink2Description="Product Folder", ComponentLink2URL=http://www.ti.com/product/GPN, ComponentLink3Description="Online Datasheet", ComponentLink3URL=http://www.ti.com/product/GPN/datasheet, CompType=IC, Datasheet Path=datasheets/IC-LMG365x.pdf, helpURL=https://upverter.com/upn/revision/1f595fc64584fe9f/, PackageReference=TO-9, PartNumber=XLMG3656R025KLAT, RoHS=UNKNOWN, SizeZ_mm=2.35mm, Standoff Height=0.1mm
S1C10 S1C14 S1C15 S2C10 S2C14 S2C15: library part CMP-0008377-2, "CAP, CERM, 22 uF, 10 V, +/- 20%, X7R, 0805", Cap_Case=0805, Manufacturer=MuRata, Supplier Part Number 1=81-GRM21BZ71A226ME5L, TempCo=X7R, Tolerance_%=20%, Value1=Unknown, Value2=10V, ValueDisplayed=22uF, AEC Category=Q200, AEC Grade=N/A, AEC Qualified=N, Cap_F=22µF, ComponentLink1Description="Datasheet link", ComponentLink1URL=http://psearch.en.murata.com/capacitor/product/GRM21BZ71A226ME15%23.pdf, CompType=Capacitor, LatestRevisionDate=2017-03-09, MountType=SMT, PackageReference=0805, PartNumber=GRM21BZ71A226ME15L, Polarized=N, Published=2008-06-19, Publisher="Texas Instruments", RoHS=Y, SizeArea_mm2=2.5, SizeAreaWB_mm2=6.75, SizeX_mm=2, SizeY_mm=1.25, SizeZ_mm=1.45, Supplier 1=Mouser, TaMax_C=125°C, TaMin_C=-55°C, Technology=Ceramic, U/M=EA, VDC_V=10V
S1C11 S2C11: library part CMP-0119293-1, "WCAP-CSGP Multilayer Ceramic Chip Capacitor, General Purpose, size 0402, X7R, 2.2nF, 50VDC", Capacitance Tolerance=+/-10%, Case/Size Code=0402, Insulation Resistance=10GOhm, Manufacturer="Wurth Elektronik", Operating Temperature Max=125°C, Operating Temperature Min=-55°C, Rated Voltage (DC)=50V, Cap_F=2.2nF, Category="Multilayer Ceramic Chip Capacitors", Ceramic Type=X7R, Component Type=Standard, ComponentLink1Description="Website Link", ComponentLink1URL=https://www.we-online.com/redexpert/article/885012205063?ad, ComponentLink2Description="Datasheet Link", ComponentLink2URL=https://www.we-online.com/redexpert/spec/885012205063?ad, Design Item ID=885012205063, Dissipation Factor=2.5%, Height=0.5mm, Length=1mm, Manufacturer Part Number=885012205063, Match Code=WCAP-CSGP, Mount="Surface Mount", Packaging="Tape and Reel", PartNumber=885012205063, Pin Count=2, Source="MLCC Capacitors.SchLib", Technical Reference=X7R0402222K050DFCT10000, Width=0.5mm